# EAGLE board MU-Breakout-v1 (EAGLE 6.6.0)
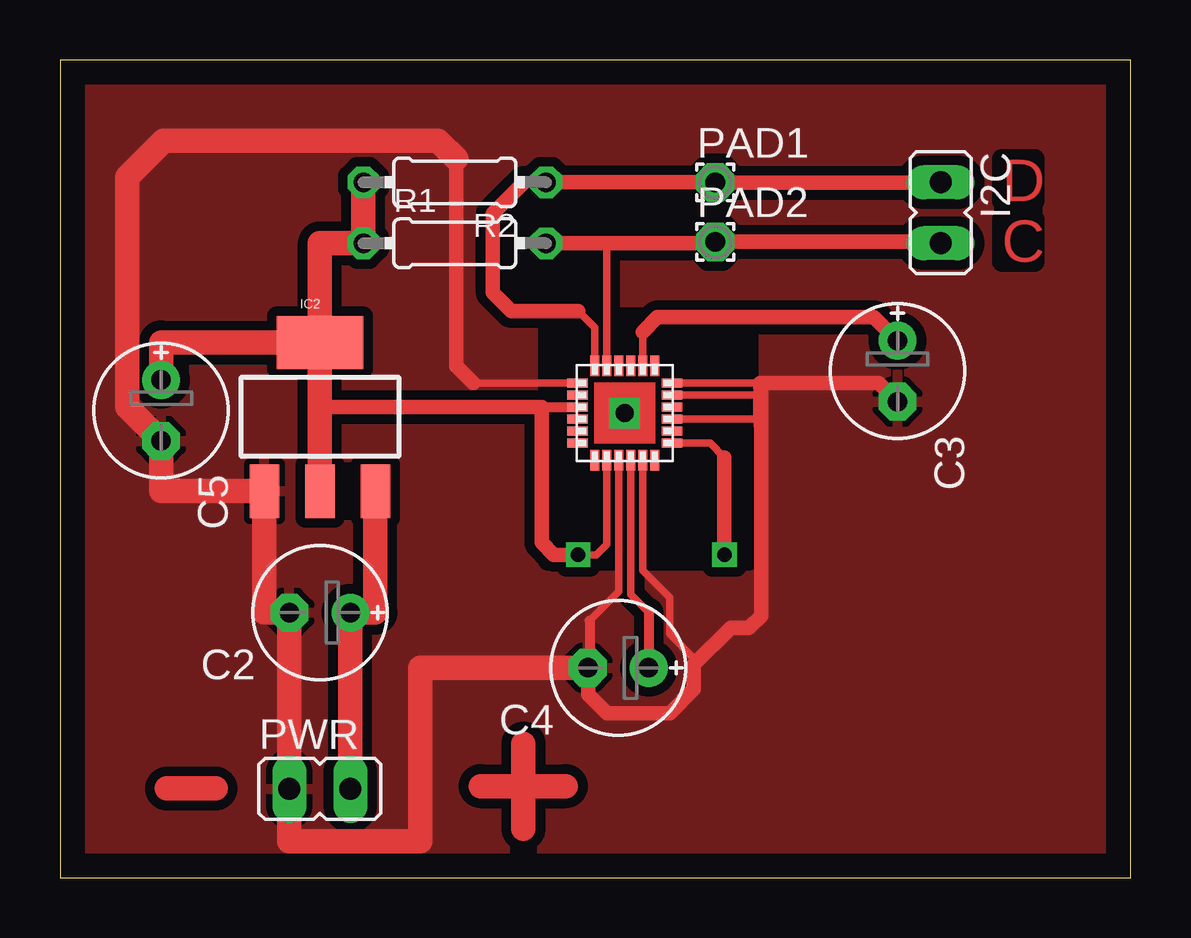
[diagram p0: board, top side]
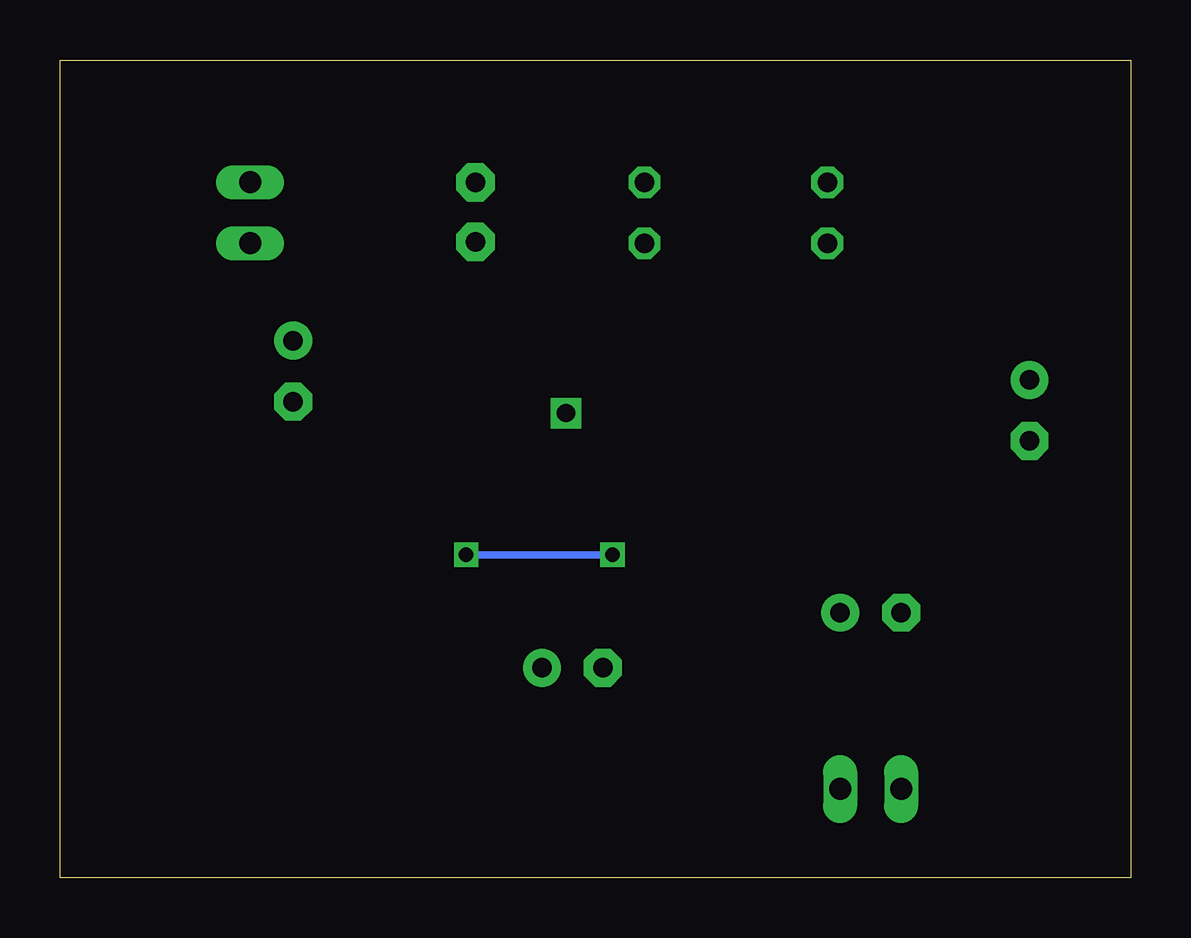
[diagram p1: board, bottom side, seen from below]

Size 44.61 x 34.09 mm. Coordinates in mm from the lower left corner, seen from the top.
Outline: 0,0 44.61,0 44.61,34.09 0,34.09 0,0
Copper layers (1*16): Top 0.035mm / dielectric 1.5mm / Bottom 0.035mm
Design rules "default": minimum track width 10mil, minimum drill 24mil, track to track 8mil, track to pad 8mil, pad to pad 8mil, via to via 8mil, smd to smd 8mil, copper to edge 40mil, drill to drill 8mil, minimum pad ring 10mil, minimum via ring 8mil, stop-mask expansion 4mil, vias tented up to drill 0mil, thermal gap 10mil
tRestrict: area 20.3,13.2 to 28.7,23.4

## Footprints (pad centres in the part's own frame; a part is rotated, then mirrored left to right if it is on the bottom)
E2,5-6E = drill 0.813 pad 1.575: + -1.27,0 | drill 0.813 pad 1.575 octagon: - 1.27,0
JP1 = drill 0.914 long: 1 0,-1.27; 2 0,1.27
SOT223 = smd 1.219 x 2.235: 1 -2.311,-3.099; 2 0,-3.099; 3 2.311,-3.099 | smd 3.6 x 2.2: 4 0,3.099
1,6/0,8 = drill 0.813 pad 1.6 octagon: 1 0,0
0204/7 = drill 0.813 octagon: 1 -3.81,0; 2 3.81,0
QFN.24.4X4 = smd 0.85 x 0.38: 1 -1.975,1.25; 2 -1.975,0.75; 3 -1.975,0.25; 4 -1.975,-0.25; 5 -1.975,-0.75; 6 -1.975,-1.25; 13 1.975,-1.25; 14 1.975,-0.75; 15 1.975,-0.25; 16 1.975,0.25; 17 1.975,0.75; 18 1.975,1.25 | smd 0.38 x 0.85: 7 -1.25,-1.975; 8 -0.75,-1.975; 9 -0.25,-1.975; 10 0.25,-1.975; 11 0.75,-1.975; 12 1.25,-1.975; 19 1.25,1.975; 20 0.75,1.975; 21 0.25,1.975; 22 -0.25,1.975; 23 -0.75,1.975; 24 -1.25,1.975 | drill 0.762 square: P$1 0,0

## Placement (x,y rotation side)
C2  [E2,5-6E]  10.83,11.05 180 top
C3  2.2nF  [E2,5-6E]  34.9,21.12 270 top
C4  0.1uF  [E2,5-6E]  23.26,8.75 180 top
C5  0.1uF  [E2,5-6E]  4.21,19.48 270 top
I2C  [JP1]  36.69,27.72 180 top
IC2  AZ1117CH-3.3TRG1  [SOT223]  10.83,19.21 0 top
PAD1  WIREPAD1,6/0,8  [1,6/0,8]  27.3,28.98 0 top
PAD2  WIREPAD1,6/0,8  [1,6/0,8]  27.3,26.51 0 top
PWR  [JP1]  10.83,3.7 270 top
R1  2k  [0204/7]  16.45,26.45 0 top
R2  2k  [0204/7]  16.45,28.99 180 top
U$2  MPU-9150.QFN  [QFN.24.4X4]  23.53,19.37 0 top

## Library data of the parts
C2-C5 = rcl
I2C PWR = jumper
IC2 = SparkFun-PowerIC; PROD_ID: VREG-08170
PAD1 PAD2 = wirepad
R1 R2 = resistor
U$2 = invensense

## Nets
+5V: C2.+ IC2.3 PWR.2
GND: C2.- C3.- C4.- C5.- IC2.1 PWR.1 U$2.1 U$2.9 U$2.11 U$2.15 U$2.17 U$2.18
N$4: C4.+ U$2.10
N$5: C3.+ U$2.20
SCL: I2C.2 PAD2.1 R1.2 U$2.23
SDA: I2C.1 PAD1.1 R2.1 U$2.24
VCC: C5.+ IC2.2 IC2.4 R1.1 R2.2 U$2.3 U$2.8 U$2.13

## Tracks (layer width: path | path; a pad name or v marks a point on that pad's centre or on a via)
+5V
  Top 1.016: PWR.2 C2.+ 13.14,11.05 IC2.3
GND
  Top 0.305: U$2.9 23.28,11.93 22.07,10.72 | 26.42,8.89 26.42,9.14 25.4,10.16 25.4,11.68 24.28,12.8 U$2.11 | 22.01,8.73 C4.- | U$2.18 29.17,20.62 | U$2.17 29.19,20.12 29.19,20.09 29.18,20.09 | U$2.15 29.18,19.12 | U$2.1 17.23,20.62
  Top 0.406: 22.07,10.72 22.07,8.83 C4.-
  Top 0.61: 22.01,8.73 22.01,7.64 22.8,6.86 25.4,6.86 26.42,7.87 26.42,8.89 27.94,10.41 28.7,10.41 29.21,10.92 29.22,20.58 29.19,18.84 29.18,19.12 29.18,20.09 | C3.- 34.12,20.62 29.17,20.62 29.19,20.12 | 17.23,20.62 16.51,21.34 16.51,29.97
  Top 1.016: C4.- 15,8.75 15,1.51 9.56,1.51 PWR.1 C2.- 8.52,11.05 IC2.1 4.21,16.11 C5.- 2.79,19.63 2.79,29.21 4.32,30.73 15.75,30.73 16.51,29.97
  pour Top (isolate 0.406): 5.59,-2.54 44.45,-0.25 44.45,34.29 0,34.29 0,-0.51
N$3
  Top 1.016: 4.46,3.71 6.49,3.71
N$4
  Top 0.305: U$2.10 23.78,11.82 24.53,11.06
  Top 0.406: 24.53,11.06 C4.+
N$5
  Top 0.305: U$2.20 24.28,22.76
  Top 0.61: 24.28,22.76 24.89,23.37 33.91,23.37 C3.+
N$6
  Top 1.016: 17.53,3.81 21.08,3.81
N$7
  Top 1.016: 19.3,5.59 19.3,2.03
SCL
  Top 0.305: 27.24,26.45 PAD2.1 | 36.63,26.51 I2C.2 | U$2.23 22.78,26.28 22.61,26.45
  Top 0.61: R1.2 22.61,26.45 27.24,26.45 | PAD2.1 36.63,26.51
SDA
  Top 0.305: U$2.24 22.28,22.93 21.59,23.62 | 19.3,28.96 20.23,28.96 R2.1 | PAD1.1 | I2C.1
  Top 0.61: 21.59,23.62 18.8,23.62 18.03,24.38 18.03,27.69 19.3,28.96 | R2.1 PAD1.1 | PAD1.1 I2C.1
VCC  (via drill 0.6)
  Top 0.305: U$2.8 22.78,13.89 22.35,13.46 v21.59,13.46 | 27.69,17.53 27.68,17.53 27.09,18.11 U$2.13
  Top 0.406: IC2.4 10.83,19.62 | 20.07,19.62 U$2.3
  Top 0.61: 10.83,19.62 20.07,19.62 20.07,13.97 20.57,13.46 v21.59,13.46 | v27.69,13.46 27.69,17.53
  Top 1.016: C5.+ 4.21,22.31 IC2.4 | IC2.2 IC2.4 | IC2.4 10.83,26.45 R1.1 R2.2
  Bottom 0.305: v21.59,13.46 v27.69,13.46

## Text on the board
Top: D | C